# Altium PCB HU_revC.PcbDoc (part 3 of 5)
Units mm, origin at the board's own origin, x right, y up, seen from the top; angles counter-clockwise.
Board outline 391 x 236 mm, 6 copper layers (Top Layer, Layer 1, Layer 2, Layer 3, Layer 4, Bottom Layer), stack 1.538 mm thick; 737 components, 574 nets, 2599 pads, 143 vias.
Unrouted connection lines stored in the file: 1682.
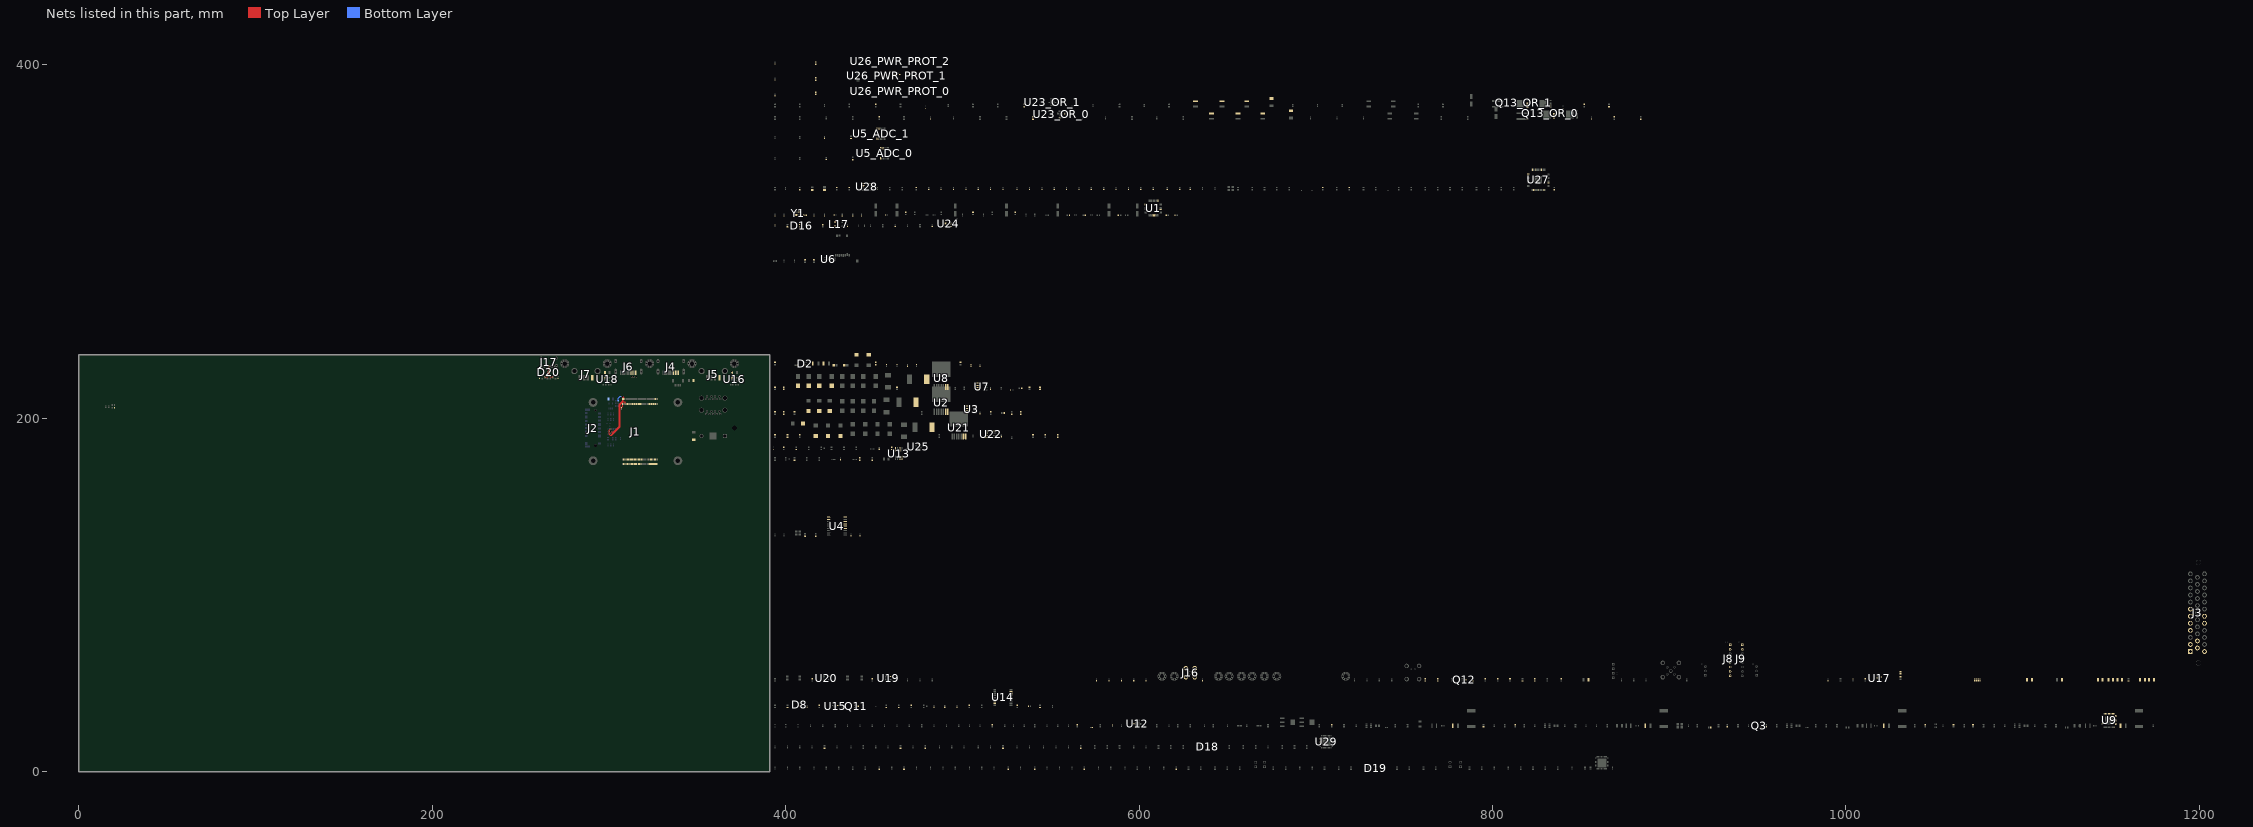
[diagram p3: the nets of this part, all layers, seen from the top]

## Footprints (in the part's own frame and the unit in brackets; to place one, negate y for a bottom-side part, rotate by r counter-clockwise, add the part's x,y. Pads: shape width x height; smd on the part's side, far side on the other; paste and mask are expansions set on the pad) (continued)
TCAN1146DYYRQ1-Footprint-1 [mil]
  rect 38.5x12 smd paste+0 mask+0: 1(-60.75,59.07) 2(-60.75,39.38) 3(-60.75,19.69) 4(-60.75,0) 5(-60.75,-19.69) 6(-60.75,-39.38) 7(-60.75,-59.07) 8(60.75,-59.07) 9(60.75,-39.38) 10(60.75,-19.69) 11(60.75,0) 12(60.75,19.69) 13(60.75,39.38) 14(60.75,59.07)
  silkscreen extent -46,-90 100,90, body extent -66,-84 66,84, height 43
TUSB4041IPAPRQ1-Footprint-1 [mil]
  rect 53x11 smd paste+0 mask+0: 1(-227.5,147.64) 2(-227.5,127.95) 3(-227.5,108.27) 4(-227.5,88.58) 5(-227.5,68.9) 6(-227.5,49.21) 7(-227.5,29.53) 8(-227.5,9.84) 9(-227.5,-9.84) 10(-227.5,-29.53) 11(-227.5,-49.21) 12(-227.5,-68.9) 13(-227.5,-88.58) 14(-227.5,-108.27) 15(-227.5,-127.95) 16(-227.5,-147.64) 33(227.5,-147.64) 34(227.5,-127.95) 35(227.5,-108.27) 36(227.5,-88.58) 37(227.5,-68.9) 38(227.5,-49.21) 39(227.5,-29.53) 40(227.5,-9.84) 41(227.5,9.84) 42(227.5,29.53) 43(227.5,49.21) 44(227.5,68.9) 45(227.5,88.58) 46(227.5,108.27) 47(227.5,127.95) 48(227.5,147.64)
  rect 11x53 smd paste+0 mask+0: 17(-147.64,-227.5) 18(-127.95,-227.5) 19(-108.27,-227.5) 20(-88.58,-227.5) 21(-68.9,-227.5) 22(-49.21,-227.5) 23(-29.53,-227.5) 24(-9.84,-227.5) 25(9.84,-227.5) 26(29.53,-227.5) 27(49.21,-227.5) 28(68.9,-227.5) 29(88.58,-227.5) 30(108.27,-227.5) 31(127.95,-227.5) 32(147.64,-227.5) 49(147.64,227.5) 50(127.95,227.5) 51(108.27,227.5) 52(88.58,227.5) 53(68.9,227.5) 54(49.21,227.5) 55(29.53,227.5) 56(9.84,227.5) 57(-9.84,227.5) 58(-29.53,227.5) 59(-49.21,227.5) 60(-68.9,227.5) 61(-88.58,227.5) 62(-108.27,227.5) 63(-127.95,227.5) 64(-147.64,227.5)
  rect 163.39x163.39 smd paste-81.19 mask-81: EPAD(0,0)
  silkscreen extent -274,-274 274,274, body extent -240,-240 240,240, height 47
WCAP-PSLP_D5H5.5 [mm] "Aluminum Polymer Capacitors, body diameter 5mm"
  rect 3x1.6 smd: 1(2.2,0) 2(-2.2,0)
  silkscreen extent -2.75,-2.75 2.75,2.75, body extent -3,-2.65 3,2.65, height 5.5
WE-TPC_1038 [mm] "Power Inductor, SMD, 2-Leads, body 10x10mm"
  rect 4.6x1.8 smd: 1(0,4.5) 2(0,-4.5)
  silkscreen extent -5,-4.5 5,6.02, body extent -5,-5 5,5, height 3.8
WL-SBCD_0606 [mm] "SMT Bi-color Chip LED Diffuesed, body 1.5x1.6mm"
  rect 0.5x0.8 smd: 1(-0.45,0.8) 2(-0.45,-0.8) 3(0.45,-0.8) 4(0.45,0.8)
  silkscreen extent -0.07,1.48 0.08,1.62, body extent -0.75,-0.8 0.75,0.8, height 0.55

## Part data
BT1: library part CMP-2000-05463-1, "Holder Battery Coin, 12 mm, 2-Pin THD, RoHS", Manufacturer=Keystone, Package Description="2-Pin Through Hole Device, Body 13.21 x 12.07 mm", Datasheet URL=https://datasheet.ciiva.com/3/3001-3954.pdf, Datasheet Version="Rev. H, 09/2006", Manufacturer URL=http://www.keyelco.com/, Mounting Technology=ThroughHole, Package Reference=3001
C1 C2 C3 C4 C5 C8 C10: library part CMP-207835-000001-3, "WCAP-PSLP Radial Can - SMD Aluminum Polymer Capacitor 0.197Dia 5.00mm ±20% 100muF 10V", Capacitance=100µF, Case/Package=Radial, ESR (Equivalent Series Resistance)=30mΩ, Leakage Current=300µA, Max Operating Temperature=105°C, Min Operating Temperature=-55°C, Ripple Current=1.97A, Tolerance=20%, Voltage Rating=10V, Diameter=5mm, Dissipation Factor=8%, Height=5.5mm, Height - Seated (Max)=5.5118mm, Length=5.5mm, Life (Hours)=2000hours, Material=Polymer, Mount="Surface Mount", Packaging="Tape & Reel (TR)", Pitch=5.3mm, Polarity=Polar, REACH SVHC=Unknown, RoHS=Compliant, Voltage Rating (DC)=10V
C6 C7 C9 C11 C12 C13 C14 C15 C16 C17 C18 C25 C26 C36 C37 C38 C39 C40 C41 C42 C43 C44 C45 C46 C47 C48 C49 C50_ADC_0 C50_ADC_1 C51_ADC_0 C51_ADC_1 C52_ADC_0 C52_ADC_1 C53 C54 C55 C56 C65 C67 C68 C69 C71 C72 C73 C74 C75 C77 C78 C79 C81 C82 C83 C85 C87 C88 C89 C90 C91 C92 C93 C94 C95 C96 C97 C98 C99 C100 C101 C102 C103 C104 C105 C106 C107 C108 C109 C110 C114 C115 C116 C117 C118 C119 C120 C121 C122 C123 C124 C125 C126 C127 C128 C129 C130 C131 C132 C133 C138 C139 C150_OR_0 C150_OR_1 C151_OR_0 C151_OR_1 C152_OR_0 C152_OR_1 C156_OR_0 C156_OR_1 C157_OR_0 C157_OR_1 C158_OR_0 C158_OR_1 C159_OR_0 C159_OR_1 C160 C161 C162 C163 C164 C165 C166 C167 C168_PWR_PROT_0 C168_PWR_PROT_1 C168_PWR_PROT_2 C169 C170 C171 C172 C173 C174 C175 C176 C177 C178 C179 C180 C181 C182 C183 C184 C185 C186 C187 C188 C189 C190 C191 C192 C193 C196 C197 C198 C199 C200 C201 C202 C203 C204 C205 C206 C207 C208 C209 C210 C211 C212 C213 C214 C215 C216 C217 C218 C219 C220 C221 C222 C223 C224 C225 C226 C227 C228 C229 C230 C231 C232 C233 C234 C235 C236 C237 C238 C239 C240 C241 C242 C243 C244 C245 C246 C247: library part CMP-001-00058-1, "LARGE PADS, 0402 CAP, CHANGE COMMENT TO MATCH REAL P/N", Capacitor Type=Ceramic, Case/Package=0402, Max Operating Temperature=85°C, Min Operating Temperature=-55°C, Mounting Technology="Surface Mount", Pins=2, RoHS Compliant=Yes
C19 C20: library part CMP-2000-07204-2, "CAP TANT 100UF 10% 25V 2917", Capacitance=100uF, Case Code (Imperial)=2917, Case Code (Metric)=7343, Dielectric Material=Tantalum, ESR (Equivalent Series Resistance)=300mR, Leakage Current=25uA, Max Operating Temperature=125°C, Min Operating Temperature=-55°C, Package Quantity=1, Ripple Current=742mA, Tolerance=10%, Voltage=25V, Case/Package=2917, Construction=Flat, Depth=4.3mm, Dissipation Factor=8%, Failure Rate=0.001%, Features="General Purpose", Height=4mm, Height - Seated (Max)=0.169inch, Lead Free="Lead Free", Length=7.3mm, Life (Hours)=2000Hour, Mount="Surface Mount", Number of Pins=2, Packaging="Tape and Reel", Polarity=Polar, Radiation Hardening=No, REACH SVHC="No SVHC", RoHS Compliant=No, Series=T491, Termination=SMD/SMT, Voltage Rating=25V, Voltage Rating (DC)=25V, Width=4.3mm
C21 C22: library part CMP-08246-002653-1, "Multilayer Ceramic Capacitors 10uF ±20% 50V X7R SMD 1210", Capacitance=10uF, Case Code (Imperial)=1210, Case Code (Metric)=3225, Dielectric=X7R, Dielectric Material=Ceramic, Max Operating Temperature=125°C, Min Operating Temperature=-55°C, Package Quantity=1000, Tolerance=20%, Voltage Rating=50V, Case/Package=1210, Height=2.5mm, Lead Free="Lead Free", Length=0.126inch, Mount="Surface Mount", Packaging="Tape and Reel", REACH SVHC="No SVHC", Series=C, Termination=SMD/SMT, Thickness=0.11inch, Voltage Rating (DC)=50V, Weight=0.000564oz, Width=0.098inch
C23 C24 C66 C70 C76 C80 C134 C135 C136 C137 C195: library part CMP-2007-03222-3, "Chip Multilayer Ceramic Capacitors for General Purpose, 0805, 22uF, X5R, 15%, 20%, 25V", Capacitance=22uF, Case Code (Imperial)=0805, Case Code (Metric)=2012, Dielectric=X5R, Max Operating Temperature=85°C, Min Operating Temperature=-55°C, Package Quantity=3000, Resistor Type=Ceramic, Tolerance=20%, Voltage=25V, Case/Package=0805, Depth=1.25mm, Height=1.25mm, Lead Free="Lead Free", Length=2mm, Material=Ceramic, Mount="Surface Mount", Packaging="Tape and Reel", REACH SVHC="No SVHC", Termination=SMD/SMT, Thickness=0.057inch, Voltage Rating=25V, Voltage Rating (DC)=25V, Weight=0.000335oz, Width=1.25mm
C27 C28 C29 C30 C140 C141 C142 C143: library part CMP-001-00065-3, "Tantalum Capacitor, Polarized, Tantalum (dry/solid), 35V, 20% +Tol, 20% -Tol, 10uF, Surface Mount, 2917", Case/Package=Molded, Max Operating Temperature=125°C, Min Operating Temperature=-55°C, Tolerance=20%, Mounting Technology="Surface Mount"
C31 C32 C33: library part CMP-2000-07208-1, "Capacitor, Tantalum, 150 uF, +/- 10%, 10 V, -55 to 125 degC, 2-Pin SMD, RoHS, Tape and Reel", Capacitance=150µF, Capacitance Tolerance=±10%, Capacitor Case Style=2917, Capacitor Terminals=SMD, Manufacturer=Kemet, Operating Temperature Range=-55°Cto+125°C, Package Description="2-Pin Surface Mount Device, Body 7.3 x 4.3 mm", Package Reference=T495-D, Voltage Rating=10V, Datasheet URL=http://capacitoredge.kemet.com/capedge2/DataSheet/Datasheet-T495D157K010ATE100.pdf?pn=T495D157K010ATE100, Datasheet Version=09/2016, ESR=0.1ohm, Manufacturer URL=http://www.kemet.com/, Mounting Technology=SurfaceMount, MSL=MSL1-Unlimited
C57 C58 C59 C60: library part CMP-001-00066-2, "Cap Tant Solid 4.7uF 50V D CASE 10% (7.3 X 4.3 X 2.8mm) SMD 7343-31 0.3 Ohm 125 C T/R", Case/Package=7343-31, Max Operating Temperature=125°C, Min Operating Temperature=-55°C, Tolerance=10%, Voltage Rating=50V, Mounting Technology="Surface Mount", Pins=2
C61 C62 C63: library part CMP-001-00067-2, "T495X107K020ATE150 diff p/n", Case/Package=2917, Max Operating Temperature=125°C, Min Operating Temperature=-55°C, Tolerance=10%, Voltage Rating=10V, Mounting Technology="Surface Mount"
C64: library part CMP-001-00067-2, Case/Package=2917, Max Operating Temperature=125°C, Min Operating Temperature=-55°C, Tolerance=10%, Voltage Rating=10V, Mounting Technology="Surface Mount"
C84 C86: library part CMP-2006-02792-2, "Chip Multilayer Ceramic Capacitors for General Purpose, 0603, 10uF, X5R, 15%, 20%, 6.3V", Capacitance=10uF, Case Code (Imperial)=0603, Case Code (Metric)=1608, Dielectric=X5R, Max Operating Temperature=85°C, Min Operating Temperature=-55°C, Package Quantity=4000, Tolerance=20%, Voltage=6.3V, Case/Package=0603, Depth=0.8mm, Height=0.8mm, Lead Free="Lead Free", Length=1.6mm, Material=Ceramic, Mount="Surface Mount", Packaging="Tape and Reel", Radiation Hardening=No, REACH SVHC="No SVHC", Termination=SMD/SMT, Thickness=0.035inch, Voltage Rating=6.3V, Voltage Rating (DC)=6.3V, Width=0.031inch
C111 C112 C113: library part CMP-2000-06226-4, "Multilayer Ceramic Capacitor 10uF 16V X5R 20% SMD 0603 T/R", Capacitance=10uF, Case Code (Imperial)=0603, Case Code (Metric)=1608, Dielectric=X5R, Max Operating Temperature=85°C, Min Operating Temperature=-55°C, Package Quantity=1, Tolerance=20%, Voltage Rating=16V, Case/Package=0603, Construction=Flat, Halogen Free="Halogen Free", Height=0.8mm, Length=0.063inch, Mount="Surface Mount", Packaging="Tape and Reel", RoHS Compliant=Yes, Series=M, Termination=SMD/SMT, Thickness=0.031inch, Voltage Rating (DC)=16V, Width=0.031inch
C144 C145 C146 C248: library part CMP-2000-07208-1, "T495D686K020ATE150 - diff p/n (68U 20V)", Capacitance=150µF, Capacitance Tolerance=±10%, Capacitor Case Style=2917, Capacitor Terminals=SMD, Manufacturer=Kemet, Operating Temperature Range=-55°Cto+125°C, Package Description="2-Pin Surface Mount Device, Body 7.3 x 4.3 mm", Package Reference=T495-D, Voltage Rating=10V, Datasheet URL=http://capacitoredge.kemet.com/capedge2/DataSheet/Datasheet-T495D157K010ATE100.pdf?pn=T495D157K010ATE100, Datasheet Version=09/2016, ESR=0.1ohm, Manufacturer URL=http://www.kemet.com/, Mounting Technology=SurfaceMount, MSL=MSL1-Unlimited
C147_OR_0 C147_OR_1: library part CMP-05427-000030-1, "CAP ALUM 10UF 20% 50V SMD", Capacitance=10uF, Case/Package=Radial, Dielectric Material=Aluminium, ESR (Equivalent Series Resistance)=1.52R, Leakage Current=3uA, Max Operating Temperature=105°C, Min Operating Temperature=-55°C, Package Quantity=1000, Ripple Current=85mA, Tolerance=20%, Voltage=50V, Construction=Cylindrical, Contact Plating=Tin, Diameter=5mm, Height=5.8mm, Height - Seated (Max)=0.228inch, Impedance=1.52R, Lead Free="Lead Free", Length=5.8mm, Life (Hours)=2000Hour, Material=Aluminium, Mount="Surface Mount", Number of Pins=2, Packaging="Tape and Reel", Radiation Hardening=No, REACH SVHC="No SVHC", Ripple Current (AC)=85mA, RoHS Compliant=Yes, Series=FK, Termination=SMD/SMT, Voltage Rating=50V, Voltage Rating (DC)=50V, Width=6.5mm
C148_OR_0 C148_OR_1 C149_OR_0 C149_OR_1: library part CMP-2000-05477-2, "General Purpose Ceramic Capacitor, 1210, 10uF, 10%, X5R, 15%, 25V", Capacitance=10uF, Case Code (Imperial)=1210, Case Code (Metric)=3225, Dielectric=X5R, Max Operating Temperature=85°C, Min Operating Temperature=-55°C, Package Quantity=1, Tolerance=10%, Voltage=25V, Case/Package=1210, Construction=Flat, Contact Plating=Tin, Depth=2.5mm, Height=2.29mm, Lead Free="Lead Free", Length=3.2mm, Mount="Surface Mount", Packaging="Tape and Reel", Radiation Hardening=No, REACH SVHC="No SVHC", RoHS Compliant=Yes, Series=-, Termination=SMD/SMT, Thickness=0.11inch, Voltage Rating=25V, Voltage Rating (DC)=25V, Width=0.098inch
C153_OR_0 C153_OR_1 C154_OR_0 C154_OR_1 C155_OR_0 C155_OR_1: library part CMP-03422-000642-1, "CAP CER 0.1UF 100V X7R 1210", Capacitance="100 nF", Manufacturer=Yageo, Package=AC1210-0.85, Temperature="-55°C to +125°C", Temperature Characteristic=X7R, Temperature Coefficient=15%, Temperature Range High=+125°C, Temperature Range Low=-55°C, Tolerance=0.1, Voltage Rating="100 V", Automotive=Yes, Automotive Grade="Grade 1", Category=Cap, ComponentLink2Description=Datasheet, ComponentLink2URL=http://www.yageo.com/documents/recent/UPY-AC_NP0X7R_16V-to-630V_12.pdf, Device Class L1="Passive Components", Device Class L2=Capacitors, Device Class L3="Ceramic Capacitors", Digikey Description="CAP CER 0.1UF 100V X7R 1210", Footprint Url=http://www.yageo.com/exep/pages/download/literatures/UPY-C_GEN_24.pdf, Height=0.95mm, Ipc Land Pattern Name=CAPC320250X85, Lead Free=Yes, Manufacturer Part Number=AC1210KKX7R0BB104, Material=Ceramic, Octopart=https://octopart.com/ac1210kkx7r0bb104-yageo-78873719, RoHS=TRUE
C194: library part CMP-00212-84766729-1, "C0805C475J4RACAUTO Cap Ceramic 4.7uF 16V X7R 5% Pad SMD 0805 125C Automotive T/R", Capacitance=4.7µF, Case/Package=0805, Dielectric=X7R, Dielectric Material=Ceramic, Max Operating Temperature=125°C, Min Operating Temperature=-55°C, Tolerance=5%, Voltage Rating=16V, Height=1.4mm, Material=Ceramic, NexarPartId=84766729, Packaging="Cut Tape", RoHS=Compliant, Voltage Rating (DC)=16V
D1: library part CMP-14398-000051-1, "DIODE SCHOTTKY 30V 5A SOD128", RoHS Compliant=Yes
D2 D4 D7 D8 D18 D19: library part CMP-004-00040-2, "Led, Red/Grn, 180Mcd/230Mcd, 624Nm/525Nm Rohs Compliant: Yes", Component Type=Standard, Design Item ID=CMP-004-00034-2, Pins=4, Source=rgled.SchLib
D3 D6 D10: library part CMP-2000-05097-3, "DIODE SCHOTTKY 40V 5A SMC", Capacitance=300pF, Forward Current=5A, Manufacturer="Diodes Inc.", Max Junction Temp=+150°C, Max Repetitive Reverse Voltage=40V, Max Surge Forward Current=100A, Package=SMC, Peak Reverse Current=0.5mA, Temperature="-55°C to +150°C", Temperature Range Low=-55°C, Automotive=No, Automotive Grade=NA, Category=Diode, ComponentLink2Description=Datasheet, ComponentLink2URL=https://www.diodes.com/assets/Datasheets/ds13012.pdf, Device Class L1="Discrete Semiconductors", Device Class L2=Diodes, Device Class L3="Schottky Diodes", Digikey Description="DIODE SCHOTTKY 40V 5A SMC", Footprint Url=https://www.diodes.com/assets/Package-Files/SMC.pdf, Height=2.5mm, Lead Free=Yes, Manufacturer Part Number=B540C-13-F, Mouser Description="Diode: Schottky rectifying; SMD; 40V; 5A; SMC; Package: reel, tape", Octopart=https://octopart.com/b540c-13-f-diodes+inc.-325873, Reverse Voltage=40V, RoHS=TRUE, Standoff Height=0.1mm, Temperature Range High=+150°C
D5 D9 D11_OR_0 D11_OR_1 D14_OR_0 D14_OR_1: library part CMP-1060-00750-1, "Zener Voltage Regulator, 500 mW, 2-Pin SOD-523, Pb-Free, Tape and Reel", Manufacturer="On Semiconductor", PartNumber=MM5Z3V3T1G, ComponentLink1Description="Manufacturer URL", ComponentLink1URL=http://www.onsemi.com/, ComponentLink2Description=Datasheet, ComponentLink2URL=http://www.onsemi.cn/pub_link/Collateral/MM5Z2V4T1-D.PDF, ComponentLink3Description="Package Specification", ComponentLink3URL=http://www.onsemi.com/pub_link/Collateral/502-01.PDF, DatasheetVersion="Rev. 10", Mounting Technology="Surface Mount", P Max (W)=0.5, PackageDescription="2-Pin SOD, Body 1.2 x 0.8 mm", PackageReference=SOD-523-2-502-01, PackageVersion="Rev. E, 09/2010", Packing="Tape and Reel", RoHS=Pb-Free, VZ Typ (V)=3.3
D12_OR_0 D12_OR_1: library part CMP-12225-000040-1, "TVS DIODE 33V 69.7V SMB", Breakdown Voltage=36.7V, Clamping Voltage=53.3V, Manufacturer=STMicroelectronics, Max Junction Temp=+150°C, Package=SMB-CA, Peak Pulse Current=11.8A, Peak Pulse Power=600W, Reverse Standoff Voltage=33V, Temperature="-55°C to +150°C", Temperature Range Low=-55°C, Automotive=No, Category=Diode, ComponentLink2Description=Datasheet, ComponentLink2URL=https://www.st.com/resource/en/datasheet/smbj.pdf, Device Class L1="Circuit Protection", Device Class L2="TVS Diodes", Device Class L3=unset, Digikey Description="TVS DIODE 33V 69.7V SMB", Direction=Bidirectional, Height=2.65mm, Lead Free=Yes, Manufacturer Part Number=SMBJ33CA-TR, Mouser Description="TVS Diodes - Transient Voltage Suppressors 600W 33V Bidirect", Number of Channels=1, Octopart=https://octopart.com/smbj33ca-tr-stmicroelectronics-347069, RoHS=TRUE, Standoff Height=0.05mm, Temperature Range High=+150°C
D13_OR_0 D13_OR_1 D17: library part CMP-1060-00750-1, "Zener Voltage Regulator, 500 mW, 2-Pin SOD-523, Pb-Free, Tape and Reel", Manufacturer="On Semiconductor", ComponentLink1Description="Manufacturer URL", ComponentLink1URL=http://www.onsemi.com/, ComponentLink2Description=Datasheet, ComponentLink2URL=http://www.onsemi.cn/pub_link/Collateral/MM5Z2V4T1-D.PDF, ComponentLink3Description="Package Specification", ComponentLink3URL=http://www.onsemi.com/pub_link/Collateral/502-01.PDF, DatasheetVersion="Rev. 10", Mounting Technology="Surface Mount", P Max (W)=0.5, PackageDescription="2-Pin SOD, Body 1.2 x 0.8 mm", PackageReference=SOD-523-2-502-01, PackageVersion="Rev. E, 09/2010", Packing="Tape and Reel", PartNumber=MM5Z3V3T1G, RoHS=Pb-Free, VZ Typ (V)=3.3
D15: library part CMP-2000-04993-2, "DIODE GEN PURP 100V 150MA SOD123", Average Rectified Current=150mA, Capacitance=4pF, Forward Voltage=1V, Max Forward Surge Current (Ifsm)=1A, Max Operating Temperature=150°C, Max Repetitive Reverse Voltage (Vrrm)=100V, Max Reverse Leakage Current=5uA, Max Surge Current=2A, Min Operating Temperature=-65°C, Package Quantity=3000, Power Dissipation=400mW, Current Rating=150mA, Element Configuration=Single, Forward Current=150mA, Height=1.2mm, Lead Free="Lead Free", Length=2.85mm, Max Reverse Voltage (DC)=100V, Mount="Surface Mount", Number of Pins=2, Output Current=150mA, Packaging="Tape and Reel", Peak Non-Repetitive Surge Current=2A, Polarity=Standard, Radiation Hardening=No, Recovery Time=4ns, Reverse Recovery Time=4ns, Voltage Rating (DC)=100V, Width=1.8mm
D16: library part CMP-12225-000055-1, "TVS DIODE 26.5V 44V SOT323-3", Breakdown Voltage=28.5V, Capacitance=3pF, Clamping Voltage=44V, Manufacturer=STMicroelectronics, Max Junction Temp=+175°C, Package=SOT323-3L, Peak Pulse Current=3A, Peak Pulse Power=170W, Reverse Standoff Voltage=26.5V, Temperature="-55°C to +175°C", Temperature Range Low=-55°C, Automotive=Yes, Automotive Grade="Grade 0", Category=Diode, ComponentLink2Description=Datasheet, ComponentLink2URL=https://www.st.com/resource/en/datasheet/esdcan02-2bwy.pdf, Device Class L1="Circuit Protection", Device Class L2="TVS Diodes", Device Class L3=unset, Digikey Description="TVS DIODE 26.5V 44V SOT323-3", Direction=Bidirectional, Height=1.1mm, Ipc Land Pattern Name=SOT65P210X95-3, Lead Free=Yes, Manufacturer Part Number=ESDCAN02-2BWY, Mouser Description="TVS Diodes / ESD Suppressors Automotive dual-line Transil, Transient voltage suppressor (TVS) for CAN bus", Number of Channels=2, Octopart=https://octopart.com/esdcan02-2bwy-stmicroelectronics-58631133, RoHS=TRUE, Standoff Height=0mm, Temperature Range High=+175°C
D20: library part CMP-04989-000002-1, "4-CHANNEL LOW-CAPACITANCE SURGE", Ambient Temperature Range High=+125°C, Ambient Temperature Range Low=-40°C, Breakdown Voltage=5.5V, Capacitance=0.55pF, Clamping Voltage=11.5V, Manufacturer="Texas Instruments", Manufacturer Part Number=ESD204DQAR, Package=DQA0010A, Peak Pulse Current=5.5A, Peak Pulse Power=50W, Reverse Standoff Voltage=3.6V, Temperature="-40°C to +125°C", Automotive=No, Category=Diode, ComponentLink2Description=Datasheet, ComponentLink2URL=http://www.ti.com/lit/ds/symlink/esd204.pdf, Device Class L1="Circuit Protection", Device Class L2="TVS Diodes", Device Class L3=unset, Digikey Description="4-CHANNEL LOW-CAPACITANCE SURGE", Direction=Bidirectional, Height=0.55mm, Lead Free=Yes, Mouser Description="4-Channel Low-Capacitance Surge and ESD Protection Diode 10-USON -40 to 125", Number of Channels=4, Octopart=https://octopart.com/esd204dqar-texas+instruments-89917476, RoHS=TRUE, Standoff Height=0mm, Temperature Range High=+125°C, Temperature Range Low=-40°C
F1 F6 F7 F8 F9 F10 F11 F12 F13 F14 F15 F16 F17: library part CMP-16042-000006-1, "FUSE BOARD MNT 5A 63VAC/VDC 1206", RoHS Compliant=Yes
F2 F3 F4 F5: library part CMP-08606-000067-1, "PTC RESET FUSE 13.2V 500MA 1210", Case Code (Imperial)=1210, Case Code (Metric)=3225, Current Rating=100A, Hold Current=500mA, Max Operating Temperature=85°C, Max Power Dissipation=600mW, Max Voltage Rating (DC)=13.2V, Min Operating Temperature=-40°C, Package Quantity=4000, Resistance=900mR, Trip Current=1A, Approvals=cULus, Case/Package=1210, Height=0.85mm, Lead Free="Lead Free", Length=3.43mm, Max Current Rating=100A, Operating Supply Voltage=13.2V, Packaging="Tape and Reel", Power Dissipation=600mW, REACH SVHC="No SVHC", Terminal Material=Copper, Termination=SMD/SMT, Time to Trip=0.1s, Voltage Rating=13.2V, Voltage Rating (DC)=13.2V, Width=2.8mm, Working Voltage=13.2V
F18_PWR_PROT_0 F18_PWR_PROT_1 F18_PWR_PROT_2: library part CMP-07399-000013-1, "FUSE BOARD MOUNT 2A 63VDC 1206", Case Code (Imperial)=1206, Case Code (Metric)=3216, Current Rating=2A, Max Operating Temperature=105°C, Min Operating Temperature=-20°C, Voltage Rating (DC)=63V, Approvals=UL, Case/Package=1206, Fuse Type="Board Mount (Cartridge Style Excluded)", Mount="Surface Mount", Packaging="Cut Tape", RoHS Compliant=Yes, Series="SinglFuse™ SF-1206FP"
J1: library part CMP-00028-00005-4, "Mechanical placeholder for RPI CM5 w/ active cooler on it"
J2: library part CMP-03365-000001-1, "CONN EDGE DUAL FMALE 67POS 0.020", Current Rating=0.5A, Manufacturer=TE, Temperature="-40°C to +80°C", Temperature Range High=+80°C, Temperature Range Low=-40°C, Voltage Rating=50V, Automotive=No, Category=Conn, ComponentLink2Description=Datasheet, ComponentLink2URL=http://www.te.com/commerce/DocumentDelivery/DDEController?Action=showdoc&DocId=Specification+Or+Standard%7F114-115006%7FB%7Fpdf%7FEnglish%7FENG_SS_114-115006_B_114-115006_REV_B.pdf%7F1-2199230-6, Conn Gender=Female, Conn Orientation="Right Angle", Contact Material=Gold,Tin, Device Class L1=Connectors, Device Class L2="Card Edge Connectors", Device Class L3=unset, Digikey Description="CONN EDGE DUAL FMALE 67POS 0.020", Footprint Url=http://www.te.com/commerce/DocumentDelivery/DDEController?Action=showdoc&DocId=Customer+Drawing%7F2199230%7FB2%7Fpdf%7FEnglish%7FENG_CD_2199230_B2.pdf%7F1-2199230-6, Height=4.2mm, Is Female=yes, Lead Free=Yes, Manufacturer Part Number=1-2199230-6, Number of Contacts=67, Number of Rows=2, Octopart=https://octopart.com/1-2199230-6-te+connectivity-34969376, Package=1-2199230-6, Pitch=0.5mm, RoHS=TRUE
J3: library part CMP-03369-000154-1, "CONN HEADER R/A 35POS 4MM", Color=Black, Current Rating=17A, Flammability Rating="UL94 V-0", Max Operating Temperature=221°C, Max Voltage Rating (AC)=250V, Min Operating Temperature=-40°C, Package Quantity=1, Circuit Application=Power, Connector System=Wire-to-Device, Connector Type="Male Pin", Contact Material=Brass, Contact Plating=Tin, Contact Type="Male Pin", Depth=37.9mm, ELV=Compliant, Fastening Type=Ramp, Gender=Male, Height=32.1mm, Housing Material=Thermoplastic, Insulation=Insulated, Lead Free="Lead Free", Length=3.03inch, Mount="Through Hole", Number of Contacts=35, Number of Positions=35, Number of Rows=3, Number of Signal Positions=35, Orientation="Right Angle", Packaging=Bulk, PCB Mount Alignment="Yes (With)", PCB Mount Retention=With, PCB Thickness=0.062inch, Pitch=0.157inch, Primary Type=Rectangular, Radiation Hardening=No, RoHS Compliant=Yes, Row Spacing=0.157inch, Sealable="Yes (With)", Series=Ampseal, Shielding=Unshielded, Tab Thickness=1.3mm, Termination=Solder, Width=37.9mm
J4 J6: library part CMP-002-00089-4, "HDMI CONNECTOR, RCPT, 19POS, SMT; Available until stocks are exhausted Alternative available", Max Operating Temperature=85°C, Min Operating Temperature=-20°C, Gender=Female, Pins=19
J5 J7: library part CMP-03360-000008-1, "CONN RCPT USB2.0 TYPEA 4P SMD RA", Current Rating=1A, Manufacturer="TE Connectivity", Temperature="-55°C to +85°C", Temperature Range High=+85°C, Temperature Range Low=-55°C, Voltage Rating=30V, Automotive=No, Category=Conn, ComponentLink2Description=Datasheet, ComponentLink2URL=https://www.te.com/usa-en/product-292303-7.html?te_bu=Cor&te_type=other&te_campaign=oct_glo_cor-oct-global-oth-prtnr-fy19-oct-octo-buy-bom_sma-298_2&elqCampaignId=35216, Conn Orientation="Right Angle", Contact Material=Gold,Nickel, Device Class L1=Connectors, Device Class L2="USB Connectors", Device Class L3=unset, Digikey Description="CONN RCPT USB2.0 TYPEA 4P SMD RA", Is Female=yes, Lead Free=Yes, Manufacturer Part Number=292303-7, Mouser Description="USB Connectors USB A R/A Recpt Assy SMT", Number of Contacts=4, Octopart=https://octopart.com/292303-7-te+connectivity-42840369, Package=292303-7, RoHS=TRUE, Shielding=true, Usb Standard="USB 2.0"
J8 J9: library part CMP-17439-000637-1, "CONN HEADER VERT 8POS 2.5MM", Color=Green, Flammability Rating="UL94 V-0", Insulation Color=Natural, Voltage Rating=250V, Connector Type=Header, Contact Finish - Mating=TIN, Contact Material=Brass, Contact Plating=Tin, Contact Shape=Square, Contact Type="Male Pin", Fastening Type=Detent, Insulation Material=Nylon, Lead Free="Lead Free", Mated Stacking Heights=9.8mm, Mount="Through Hole", Number of Positions=8, Number of Rows=1, Packaging=Bulk, Pitch=2.5mm, Series=XH, Termination=Press-Fit
J10 J11: library part CMP-17438-000009-1, "CONN HEADER VERT 3POS 2.5MM", Color=Natural, Contact Resistance=20mR, Housing Color=White, Max Current Rating=3A, Max Operating Temperature=85°C, Max Voltage Rating (AC)=250V, Min Operating Temperature=-25°C, Connector Type="Male Pin", Contact Material=Brass, Contact Plating=Tin, Contact Type="Male Pin", Depth=5.75mm, Fastening Type=Detent, Gender=Male, Housing Material=Polyamide, Lead Free="Lead Free", Length=9.9mm, Mount="Through Hole", Number of Positions=3, Number of Rows=1, Orientation=Straight, Packaging=Bulk, Pitch=0.098inch, Series=XH, Termination=Press-Fit
J12: library part CMP-002-00044-4, "Connector RF Mini-FAKRA Plug 9GHz 50Ohm Solder Right Angle Through Hole", Component Type=Standard, Design Item ID=CMP-002-00085-1, Pins=9, Source=fakra4ch.SchLib
J13: library part CMP-17439-000370-1, "CONN HEADER SMD 4POS 1MM", Color=Natural, Flammability Rating="UL94 V-0", Package Quantity=1, Voltage Rating=50V, Connector Type=Header, Contact Finish - Mating=TIN, Contact Material="Copper Alloy", Contact Plating=Tin, Contact Shape=Square, Contact Type="Male Pin", Fastening Type=Pull, Insulation Color=Natural, Insulation Material=Nylon, Lead Free="Lead Free", Mated Stacking Heights=4.9mm, Mount="Surface Mount", Number of Positions=4, Number of Rows=1, Packaging="Cut Tape", Pitch=0.039inch, Series=SR, Termination=Solder
J14: library part CMP-04776-000290-2, "CONN HEADER VERT 4POS 2.54MM", Ambient Temperature Range High=105°C, Current Rating=500mA, Housing Color=Beige, Manufacturer Lifecycle Status=ACTIVE, Max Operating Temperature=75°C, Min Operating Temperature=0°C, Voltage Rating=250V, Contact Material="Brass, Copper", Contact Plating=Tin, Country of Origin=HK, Depth=5.84mm, Gender=Male, Glow Wire Compliant=Non-compliant, Halogen Free="Low Halogen", Height=7.7mm, Housing Material=Nylon, Lead Pitch=2.54mm, Length=10.2mm, Lifecycle Status=Production, Mount="Through Hole", NexarPartId=854935, Number of Circuits=4, Number of Contacts=4, Number of Pins=4, Number of Positions=4, Number of Rows=1, Orientation=Vertical, Packaging=Bulk, Pitch=2.54mm, Plating=Copper, Radiation Hardening=No, REACH SVHC=Unknown, RoHS=Compliant, Schedule B="8536694040, 8536694040", Termination="Through Hole", Voltage Rating (DC)=250V
J15: library part CMP-002-00103-2, "RF Connector, 2 Contact(s), Male, Panel Mount, Board And Panel Mount, Solder Terminal, Plug", Max Operating Temperature=105°C, Min Operating Temperature=-40°C, Pins=2
J16: library part CMP-002-00054-2, "RF F Connector, Male, Board Mount, Solder Terminal, Plug", Connector Type="RF F CONNECTOR", Mounting Technology=Board, RoHS Compliant=Yes
J17: library part CMP-002-00091-1, "USB Connector, USB Type C, USB 2.0, Receptacle, 24 Ways, Surface Mount, Through Hole Mount", Pins=24
J18: library part CMP-002-00102-1, "Conn USB Type A F 18 POS 2mm/2.5mm Solder ST Thru-Hole 18 Terminal 2 Port Embossed T/R", Max Operating Temperature=85°C, Min Operating Temperature=-20°C, Connector Type=USB, Gender=Female, Mounting Technology="Through Hole", Pins=18
J19 J20 J21 J22: library part CMP-05178-000003-1, "CONN HEADER VERT 2POS 2.54MM", RoHS Compliant=Yes
L1 L16: library part CMP-2000-07146-2, "FIXED IND 15UH 5A 27 MOHM SMD", Case/Package=1260, Current Rating=5A, DC Resistance (DCR)=27mR, Frequency=17.6MHz, Inductance=15uH, Inductance Tolerance=20%, Max Operating Temperature=125°C, Min Operating Temperature=-40°C, Package Quantity=600, Resistance=27MR, Resistor Type=Wirewound, Saturation Current=4.6A, Test Frequency=100kHz, Core Material=Ferrite, DC Current=5A, Depth=12.8mm, Height=6mm, Height - Seated (Max)=0.256inch, Length=12.5mm, Material=Steel, Max DC Current=5A, Military Standard=Not, Mount="Surface Mount", Number of Pins=2, Packaging="Tape and Reel", Q Factor=25, REACH SVHC="No SVHC", RMS Current (Irms)=5A, RoHS Compliant=Yes, Sample Rate (Hz)=100kHz, Self Resonant Frequency=17.6MHz, Series=SRR1260, Shielding=Shielded, Termination=SMD/SMT, Tolerance=20%, Width=12.5mm
L2: library part CMP-2000-07146-2, "DIFF P/N: SRR1260-220M /  / FIXED IND 22UH 5A 27 MOHM SMD", Case/Package=1260, Current Rating=5A, DC Resistance (DCR)=27mR, Frequency=17.6MHz, Inductance=15uH, Inductance Tolerance=20%, Max Operating Temperature=125°C, Min Operating Temperature=-40°C, Package Quantity=600, Resistance=27MR, Resistor Type=Wirewound, Saturation Current=4.6A, Test Frequency=100kHz, Core Material=Ferrite, DC Current=5A, Depth=12.8mm, Height=6mm, Height - Seated (Max)=0.256inch, Length=12.5mm, Material=Steel, Max DC Current=5A, Military Standard=Not, Mount="Surface Mount", Number of Pins=2, Packaging="Tape and Reel", Q Factor=25, REACH SVHC="No SVHC", RMS Current (Irms)=5A, RoHS Compliant=Yes, Sample Rate (Hz)=100kHz, Self Resonant Frequency=17.6MHz, Series=SRR1260, Shielding=Shielded, Termination=SMD/SMT, Tolerance=20%, Width=12.5mm
L3 L6 L9 L12: library part CMP-0227-00094-3, Ambient Temperature Range High=95°C, Ambient Temperature Range Low=-40°C, Case/Package=Nonstandard, Current Rating=1.2A, DC Resistance (DCR)=255mΩ, Inductance=100µH, Inductance Tolerance=30%, Max Operating Temperature=125°C, Self Resonant Frequency=6MHz, Test Frequency=100kHz, Composition=Wirewound, Core Material=Ferrite, Depth=10mm, Height=3.8mm, Height - Seated (Max)=4.0894mm, Length=10mm, Max DC Current=1.2A, Min Operating Temperature=-40°C, Mount="Surface Mount", NexarPartId=8917123, Number of Pins=2, Packaging="Cut Tape (CT)", REACH SVHC=Unknown, Resistance=255mΩ, RMS Current (Irms)=1.2A, RoHS=Compliant, Saturation Current=1.2A, Shielding=Shielded, Termination=SMD/SMT, Tolerance=30%, Weight=1.273007g, Width=10mm
L4 L7 L10 L13: library part CMP-11268-000041-1, "NOT COILCRAFT - ACTUAL P# --> ADL32VHC-220M /  - Power Injection Chokes for PoC", Ambient Temperature Range High=+125°C, Ambient Temperature Range Low=-40°C, Inductance=22uH, Manufacturer=coilcraft, Manufacturer Part Number=1210POC-223MRC, Package=1210POC, Rms Current=700mA, Saturation Current=720mA, Self Resonant Frequency=70MHz, Series Resistance=0.88Ω, Test Frequency=100kHz, Tolerance=20%, Automotive=Yes, Automotive Grade="Grade 1", Category=Ind, ComponentLink2Description=Datasheet, ComponentLink2URL=https://drive.google.com/open?id=15FlOq8Y4YbRFohfA_cJ40jgnqs8va2Mh, Core Material=Ferrite, Device Class L1="Passive Components", Device Class L2=Inductors, Device Class L3="Fixed Inductors", Height=3mm, Lead Free=Yes, Octopart=https://octopart.com/1210poc-223mrc-coilcraft-103207315, RoHS=TRUE
L5 L8 L11 L14: library part CMP-11268-000007-1, "Fixed Inductors PFL1609 Low Profile 0.56 uH 20 % 1.4 A", Ambient Temperature Range High=+105°C, Ambient Temperature Range Low=-40°C, Inductance=0.56uH, Manufacturer=coilcraft, Package=PFL1609, Rms Current=1100mA, Saturation Current=710mA, Self Resonant Frequency=600MHz, Series Resistance=130mΩ, Test Frequency=7.9MHz, Tolerance=20%, Automotive=Yes, Automotive Grade="Grade 1", Category=Ind, ComponentLink2Description=Datasheet, ComponentLink2URL=https://www.coilcraft.com/pdfs/pfl1609.pdf, Composition=Wirewound, Core Material=Composite, Device Class L1="Passive Components", Device Class L2=Inductors, Device Class L3="Fixed Inductors", Height=0.95mm, Lead Free=Yes, Manufacturer Part Number=PFL1609-561MEW, Mouser Description="Fixed Inductors PFL1609 Low Profile 0.56 uH 20 % 1.4 A", Octopart=https://octopart.com/pfl1609-561mew-coilcraft-20329171, RoHS=TRUE, Shielding=true
L15: library part CMP-06042-013840-1, "Wire Wound RF Inductor 27nH ±5% 440mA 0.21Ω 0603 (1608)", Case Code (Imperial)=0603, Case Code (Metric)=1608, Current Rating=440mA, DC Resistance (DCR)=210mR, Inductance=27nH, Max Operating Temperature=125°C, Min Operating Temperature=-55°C, Package Quantity=4000, Resistor Type=Wirewound, Self Resonant Frequency=3.7GHz, Test Frequency=100MHz, Tolerance=5%, Case/Package=0603, Core Material=Non-Magnetic, DC Current=440mA, Depth=1mm, Height=0.8mm, Height - Seated (Max)=0.039inch, Lead Free="Lead Free", Length=1.6mm, Max DC Current=440mA, Military Standard=Not, Mount="Surface Mount", Packaging="Tape and Reel", Q Factor=40, Radiation Hardening=No, Shielding=Unshielded, Termination=SMD/SMT, Weight=0.000106oz, Width=0.8mm
L17: library part CMP-07251-000006-1, "CMC 51UH 200MA 2LN 2KOHM SMD", Case/Package=4532, Current=200mA, DC Resistance (DCR)=3.5R, Inductance=51uH, Insulation Resistance=10MR, Max Operating Temperature=125°C, Min Operating Temperature=-40°C, Package Quantity=1, Resistance=2kR, Self Resonant Frequency=100kHz, Tolerance=50%, Voltage Rating (DC)=50V, Contact Plating=Tin, Core Material=Ferrite, Current Rating=200mA, DC Current=200mA, Depth=3.4mm, Element Configuration=Dual, Height=0.118inch, Impedance=2kR, Lead Free="Lead Free", Length=4.5mm, Material=Steel, Max DC Current=200mA, Mount="Surface Mount", Number of Lines=2, Packaging="Tape and Reel", REACH SVHC="No SVHC", RoHS Compliant=Yes, Series=SRF4532, Termination=SMD/SMT, Test Frequency=100kHz, Width=0.126inch
L18: library part CMP-08256-000023-1, "CMC 80UH 70MA 2LN 3.8KOHM SMD"
MH1 MH2 MH3 MH4 MH5 MH6 MH7 MH8 MH9 MH10 MH11 MH12 MH13 MH14: library part CMP-00028-00001-11, "Plated mounting hole with 6 peripheral vias. This is a generic symbol that groups all relevant footprints."
MP1: library part CMP-03913-59774857-1, "9774025243R Spacer Material: Steel, Tin-Plated Mounting: SMT Series: WA-SMST Thread D: M2", Max Operating Temperature=150°C, Min Operating Temperature=-55°C, Height=2.5mm, Length=2.5mm, Material=Steel, NexarPartId=59774857, Outside Diameter=4.3434mm, Packaging="Tape and Reel", Plating=Tin, REACH SVHC=Unknown, RoHS=Compliant, Threaded/Unthreaded=Threaded
Q2 Q4 Q5 Q6: library part CMP-2000-04939-1, "Dual N & P-Channel 2.5 V Specified PowerTrench(TM) MOSFET, -55 to 150 degC, 6-Pin SOT-23, RoHS, Tape and Reel", Manufacturer=Fairchild, Maximum Continuous Drain Current=2.7@NChannel, Maximum Drain Source Voltage=20V, Maximum Gate Source Voltage=±8V, Operating Temperature=-55to150degC, Package=6SuperSOT, Package Description="6-Pin Small Outline Transistor, Body 2.9 x 1.6 mm, Pitch 0.95 mm", Package Reference=SOT23-6, Package Version="Rev. 5, 05/2015", Category=MOSFET, Channel Mode=Enhancement, Channel Type=N, Datasheet URL=https://www.fairchildsemi.com/datasheets/FD/FDC6327C.pdf, Datasheet Version="Rev. E, 07/2000", Manufacturer URL=https://www.fairchildsemi.com/, Mounting=SurfaceMount, Package URL=https://www.fairchildsemi.com/package-drawings/MA/MA06A.pdf, Packaging=Tape&Reel, Rad Hard=No, RDS-on=80@4.5V@NChannel, Typical Fall Time=3@NChannel, Typical Rise Time=9@NChannel, Typical Turn-Off Delay Time=12@NChannel, Typical Turn-On Delay Time=5@NChannel
Q3: library part CMP-1259-00116-1, "Dual P-Channel Trench MOSFET, -50 V, -0.16 A, -55 to 150 degC, 6-Pin SOT363, Tape and Reel", Manufacturer="NXP Semiconductors", Automotive Qualified=Y, Channel Type=P, Code_JEITA=SC-88, ComponentLink1Description="Manufacturer URL", ComponentLink1URL=http://www.nxp.com/, ComponentLink2Description=Datasheet, ComponentLink2URL=http://www.nxp.com/documents/data_sheet/BSS84AKS.pdf, ComponentLink3Description="Package Specification", ComponentLink3URL=http://www.nxp.com/documents/outline_drawing/sot363_po.pdf, DatasheetVersion="Rev. 1", ID [max] (A)=-0.16, IDM [max] (A)=-0.64, Mounting Technology="Surface Mount", PackageDescription="6-Pin Small Outline Transistor Package, Body 2 x 1.25 mm, Pitch 0.65 mm", PackageReference=SOT363, PackageVersion="06-03-16, 03/2006", Packing="Tape & Reel", PartNumber=BSS84AKS,115, VDS [max] (V)=-50, VGSth [typ] (V)=-1.6
Q7 Q8 Q15 Q16: library part CMP-013-00018-2, "Trans MOSFET P-CH 20V 22.1A 8-Pin PowerPAK 1212 EP T/R", Component Type=Standard, Design Item ID=CMP-013-00036-4, Pins=5, Source=SISH615ADN-T1-GE3.SchLib
Q9 Q11 Q12 Q17: library part CMP-2000-05968-1, "N-Channel Enhancement Mode Mosfet, 50 V, 200 mA, -55 to 150 degC, 6-Pin SOT-323, RoHS, Tape and Reel", Id - Continuous Drain Current=200mA, Manufacturer=DiodesIncorporated, Maximum Operating Temperature=+150C, Minimum Operating Temperature=-55C, Package / Case=SOT-323-3, Package Description="3-Pin Small Outline Transistor, Body 2 x 1.25 mm, Pitch 0.65 mm", Package Reference=SOT323, Pd - Power Dissipation=200mW, Rds On - Drain-Source Resistance=1.4Ohms, Vds - Drain-Source Breakdown Voltage=75V, Vgs - Gate-Source Voltage=20V, Brand=DiodesIncorporated, Channel Mode=Enhancement, Configuration=Single, Datasheet URL=http://www.diodes.com/_files/datasheets/ds30206.pdf, Datasheet Version="Rev. 11-2, 09/2013", Factory Pack Quantity=3000, Forward Transconductance - Min=0.1S, Height=1mm, Length=2.2mm, Manufacturer URL=http://www.diodes.com/, Mounting Style=SMD/SMT, Mounting Technology=SurfaceMount, Number of Channels=1Channel, Packaging=Reel, Product=MOSFETSmallSignal, Product Category=MOSFET, RoHS=True, Series=BSS138, Technology=Si, Transistor Polarity=N-Channel, Transistor Type=1N-Channel, Type=EnhancementModeFieldEffectTransistor, Typical Turn-Off Delay Time=20ns, Typical Turn-On Delay Time=20ns, Unit Weight=0.000212oz, Width=1.35mm
Q10: library part CMP-2000-06170-1, "P-Channel Enhancement Mode MOSFET, 310 mW, 20 V, -55 to 150 degC, 3-Pin SOT-323, RoHS, Tape and Reel", Drain-Source On Resistance-Max=750mO, Drain-to-Source Voltage [Vdss]=20V, Manufacturer="Diodes Inc", Package Description="3-Pin Small Outline Transistor, Body 2 x 1.25 mm, Pitch 0.65 mm", Package Reference=SOT323, Rated Power Dissipation=310mW, Channel Type=P-Channel, Datasheet URL=http://www.diodes.com/_files/datasheets/ds31861.pdf, Datasheet Version="Rev. 3-2, 09/2013", Manufacturer URL=http://www.diodes.com/, Mounting Technology=SurfaceMount, Qg Gate Charge=0.622nC
Q13_OR_0 Q13_OR_1 Q14_OR_0 Q14_OR_1: library part CMP-32901-001049-1, "TRENCH 40<-<100V PG-TDSON-8"
R1 R2 R3 R4 R5 R7 R9 R11 R12 R14 R15 R18 R19 R20 R21 R24 R29 R31 R32 R33 R34 R35 R37 R38 R39 R40 R44 R45 R46 R47 R48 R49 R50 R51 R56 R57 R58_ADC_0 R58_ADC_1 R59 R60 R61 R62 R63 R66 R67 R68 R69 R71 R72 R73 R74 R75 R76 R77 R78 R79 R80 R81 R83 R84 R85 R86 R87 R88 R89 R90 R91 R92 R94 R95 R96 R97 R98 R99 R101 R102 R103 R104 R105 R106 R107 R108 R109 R110 R111 R112 R113 R114 R115 R116 R117 R118 R119 R120 R121 R122 R123 R125 R126 R127 R128 R129 R130 R131 R132 R133 R134 R135 R136 R137 R138 R139 R144 R147 R149 R150 R151 R152 R153 R154 R155 R156 R157 R158 R159 R160 R161 R162 R165 R166 R169 R170 R175 R176 R177 R178 R179 R180 R183 R184 R185 R186 R187_OR_0 R187_OR_1 R188_OR_0 R188_OR_1 R190_OR_0 R190_OR_1 R191_OR_0 R191_OR_1 R192_OR_0 R192_OR_1 R193_OR_0 R193_OR_1 R194_OR_0 R194_OR_1 R195_OR_0 R195_OR_1 R196_OR_0 R196_OR_1 R197_OR_0 R197_OR_1 R198_OR_0 R198_OR_1 R199_OR_0 R199_OR_1 R200_OR_0 R200_OR_1 R201_OR_0 R201_OR_1 R202 R203 R204 R205 R206 R207 R208 R209 R210 R211 R212 R213_PWR_PROT_0 R213_PWR_PROT_1 R213_PWR_PROT_2 R214 R215 R216 R217 R218 R219 R220 R221 R222 R223 R224 R225 R226 R227 R228 R229 R230 R231 R232 R233 R234 R235 R236 R237 R238 R239 R240 R241 R242 R243 R244 R245 R246 R247 R248 R249 R250 R251 R252 R253 R254 R255 R256 R257 R258 R259 R260 R261 R262 R263 R264 R265 R266 R267 R268 R269 R270 R271 R272 R273 R274 R275 R276 R277 R278 R279 R280 R281 R282 R283 R284 R285 R286 R287 R288 R289 R290: library part CMP-009-00002-14, "Resistor"
R6 R8 R10 R13 R16 R17 R22 R23 R25 R26 R27 R28 R30 R41 R42 R43 R65 R124 R140 R141 R142 R143 R146 R148 R163 R164 R167 R168 R171 R172 R173 R174 R182: library part CMP-009-00118-2, "READ THE NAME", Component Type=Standard, Design Item ID=CMP-009-00206-2, Pins=2, Source=0402jump.SchLib
R36 R64 R145 R181: library part CMP-2000-00869-1, Manufacturer=Panasonic, Part Number=ERT-J1VR103J
R70 R82 R93 R100: library part CMP-009-00002-14
R189_OR_0 R189_OR_1: library part CMP-00597-24927456-1, "KRL6432E-M-R003-F-T1 Metal Foil Low Resistance Chip Resistor (long-side terminal), 2512, RoHS", Case Code (Imperial)=2512, Case Code (Metric)=6432, Max Operating Temperature=155°C, Min Operating Temperature=-55°C, Power Rating=3W, Resistance=3mΩ, Temperature Coefficient=50ppm/°C, Tolerance=1%, Case/Package=2512, Composition="Metal Foil", Height=700µm, Length=3.1mm, Lifecycle Status=Production, Max Thickness=700µm, NexarPartId=24927456, RoHS=Compliant, Termination=SMD/SMT, Weight=40.511469mg, Width=6.3mm
SD1: library part CMP-2000-05848-1, "MicroSD(TM), Pitch 1.1 mm, 8 Position, Height 1.88 mm, -20 to 85 degC, RoHS, Tape and Reel", Manufacturer=Molex, Package Description="MicroSD(TM), Pitch 1.1 mm, 8 Position, Height 1.88 mm", Datasheet URL=http://www.molex.com/pdm_docs/sd/473521001_sd.pdf, Datasheet Version="Rev. G, 01/2012", Manufacturer URL=http://www.molex.com/, Mounting Technology=SurfaceMount, Package Reference=473521001
SW1: library part CMP-10040-000029-1, "SWITCH TACTILE SPST-NO 0.02A 15V", Current Rating=5A, Flammability Rating="UL94 V-0", Insulation Color=Black, Max Operating Temperature=85°C, Min Operating Temperature=-40°C, Operating Force=240gf, Actuator Type=Standard, Connector Type=USB, Contact Plating=Gold, Gender=Receptacle, Illumination Type=Non-Illuminated, Mechanical Life=500000Cycles, Mount="Surface Mount", Number of Contacts=24, Number of Ports=1, Packaging="Tape and Reel", Switch Function=Off-Mom, Switch Travel=0.13mm, Termination=Solder, Throw Configuration=SPST
TP1 TP2 TP3 TP4: library part CMP-00025-2, "Test Point .6mm"
TP5 TP6 TP7: library part CMP-00025-3, "Test Point .6mm"
U1: library part CMP-015-00016-2, "Highly Integrated USB Audio I/O Controller"
U2: library part CMP-0069-00190-3, "SIMPLE SWITCHER® High Efficiency 5A Step-Down Voltage Regulator, 7-pin TO-263", Manufacturer="Texas Instruments", PackageTopMarking=NSUZXYTTE#*LM2678*S-5.0, PowerWise=N, Code_JEDEC=MO-169-AC, ComponentLink1Description="Datasheet URL", ComponentLink1URL=http://www.ti.com/general/docs/lit/getliterature.tsp?genericPartNumber=LM2678&fileType=pdf, CompType=Switcher, PackageDescription="TO-263, Molded, .400 x .390 x .180in Body, 7 Lead, .050in Pitch, Surface Mount", PackageReference=KTW0007B, PinCount=7, RoHS=N
U3 U7 U22: library part CMP-1557-00012-2, "SENSOR CURRENT HALL 12.5A AC/DC", Case/Package=SOIC, Current Sensing=12.5A, Frequency=100kHz, Max Operating Temperature=125°C, Max Supply Current=5.5mA, Max Supply Voltage=5.5V, Min Operating Temperature=-40°C, Min Supply Voltage=3V, Operating Supply Voltage=3.3V, Package Quantity=1, Quiescent Current=4mA, -3db Bandwidth=100kHz, Accuracy=5%, Bandwidth=100kHz, Height=1.5mm, Length=4.9mm, Linearity=1%, Number of Channels=1, Number of Pins=8, Packaging="Tape and Reel", Polarity=Bidirectional, REACH SVHC="No SVHC", Response Time=4.6us, RoHS Compliant=Yes, Sensitivity=110mV/A, Series=-, Width=3.9mm
U4: library part CMP-0186-00133-3, "IC CAN CONTROLLER W/SPI 18SOIC", Ambient Temperature Range High=+125°C, Ambient Temperature Range Low=-65°C, Manufacturer=Microchip, Max Supply Voltage=5.5V, Min Supply Voltage=2.7V, Nominal Supply Current=10mA, Package=C04-051, Temperature="-40°C to +85°C", Temperature Range High=+85°C, Temperature Range Low=-40°C, Automotive=No, Category=IC, ComponentLink2Description=Datasheet, ComponentLink2URL=http://ww1.microchip.com/downloads/en/DeviceDoc/MCP2515-Stand-Alone-CAN-Controller-with-SPI-20001801J.pdf, Device Class L1="Integrated Circuits (ICs)", Device Class L2="Interface ICs", Device Class L3=Controllers, Digikey Description="IC CAN CONTROLLER W/SPI 18SOIC", Footprint Url=http://ww1.microchip.com/downloads/en/DeviceDoc/18L_SOIC_Wide_7.50_SO_C04-0051D.pdf, Function=Controller, Height=2.65mm, Interface=SPI,CAN, Ipc Land Pattern Name=SOIC127P1030X265-18, Lead Free=Yes, Manufacturer Part Number=MCP2515-I/SO, Mouser Description="CAN Interface IC W/ SPI Interface", Octopart=https://octopart.com/mcp2515-i%2Fso-microchip-430187, RoHS=TRUE, Standoff Height=0.1mm
U5_ADC_0 U5_ADC_1: library part CMP-0054-00372-2, "8-Channel, 50 kSPS to 200 kSPS, 8-Bit A/D Converter, 16-pin TSSOP, Pb-Free", Manufacturer="National Semiconductor", PackageTopMarking=NSUZXYTT*88S022*CIMT, PowerWise=Y, Code_JEDEC=MO-153-AB, ComponentLink1Description="ADC088S022 Datasheet", ComponentLink1URL=http://www.national.com/ds/AD/ADC088S022.pdf, ComponentLink2Description="ADC088S022 Web Page", ComponentLink2URL=http://www.national.com/pf/AD/ADC088S022.html, ComponentLink3Description="MTC16 Package Page", ComponentLink3URL=http://www.national.com/packaging/folders/mtc16.html, CompType="ADC IC", DatasheetVersion=Feb-2010, PackageDescription="Molded TSSOP, Jedec, 5 x 4.4 x 0.9mm Body, 16 Lead, 0.65mm Pitch", PackageReference=MTC16, PackageVersion="revD, Jun-2003", PinCount=16, RevisionNote="Component URLs added", RoHS=Y
U6 U16 U18 U19 U20 U31: library part CMP-019-00060-1, "SINGLE CHANNEL POWER DISTRIBUTION LOAD SWITCH, -40 to 85°C pF, RoHS", Max Operating Temperature=85°C, Max Supply Voltage=5.5V, Min Operating Temperature=-40°C, Min Supply Voltage=2.7V
U8: library part CMP-0069-00195-3, "SIMPLE SWITCHER® High Efficiency 5A Step-Down Voltage Regulator, 7-pin TO-263, Pb-Free", Manufacturer="Texas Instruments", PackageTopMarking=NSUZXYTTE#*LM2678*S-3.3, PowerWise=N, Code_JEDEC=MO-169-AC, ComponentLink1Description="Datasheet URL", ComponentLink1URL=http://www.ti.com/general/docs/lit/getliterature.tsp?genericPartNumber=LM2678&fileType=pdf, CompType=Switcher, PackageDescription="TO-263, Molded, .400 x .390 x .180in Body, 7 Lead, .050in Pitch, Surface Mount", PackageReference=KTW0007B, PinCount=7, RoHS=Y
U9: library part CMP-015-00011-4, "Quad Tunneling GMSL2/1 to CSI-2 Deserializer"
U10: library part CMP-0244-00308-1, "Fixed Low Drop Positive Voltage Regulator, 1.8V, 4-Pin SOT-223, Tape and Reel", ComponentLink1Description="Manufacturer URL", ComponentLink1URL=http://www.st.com, ComponentLink2Description=Datasheet, ComponentLink2URL=http://www.st.com/internet/com/TECHNICAL_RESOURCES/TECHNICAL_LITERATURE/DATASHEET/CD00000544.pdf, DatasheetVersion=1/11/2011, PackageDescription="4-Pin SOT-223 Package, 6.5 x 3.5 mm Body, 2.3 mm Pitch, 7 mm Lead Span", PackageReference=SOT-223, PackageVersion=2010
U11: library part CMP-0244-00318-1, "Fixed Low Drop Positive Voltage Regulator, 1.2V, 4-Pin SOT-223, Tape and Reel", ComponentLink1Description="Manufacturer URL", ComponentLink1URL=http://www.st.com, ComponentLink2Description=Datasheet, ComponentLink2URL=http://www.st.com/internet/com/TECHNICAL_RESOURCES/TECHNICAL_LITERATURE/DATASHEET/CD00000544.pdf, DatasheetVersion=1/11/2011, PackageDescription="4-Pin SOT-223 Package, 6.5 x 3.5 mm Body, 2.3 mm Pitch, 7 mm Lead Span", PackageReference=SOT-223, PackageVersion=2010
U12: library part CMP-06317-000025-1, "QUAD HIGH-SIDE CURRENT SENSOR", Max Operating Temperature=85°C, Min Operating Temperature=-40°C, Accuracy=1%, Mount="Surface Mount", Packaging="Cut Tape", RoHS Compliant=No
U13: library part CMP-1557-00015-2, "SENSOR CURRENT HALL 25A AC/DC", Case/Package=SOIC, Current Sensing=25A, Frequency=100kHz, Max Operating Temperature=125°C, Max Supply Current=5.5mA, Max Supply Voltage=5.5V, Min Operating Temperature=-40°C, Min Supply Voltage=3V, Operating Supply Voltage=3.3V, Package Quantity=1, Quiescent Current=4mA, -3db Bandwidth=100kHz, Accuracy=4%, Bandwidth=100kHz, Height=1.5mm, Length=4.9mm, Linearity=1%, Number of Channels=1, Number of Pins=8, Packaging="Tape and Reel", Polarity=Bidirectional, REACH SVHC="No SVHC", Response Time=4.6us, RoHS Compliant=Yes, Sensitivity=55mV/A, Series=-, Width=3.9mm
U14: library part CMP-010-00031-2, "Gnss Lcc Rx Mod, Rom, Crystal"